# Altium PCB ControlBoard_v3.PcbDoc (part 2 of 3)
Units mm, origin at the board's own origin, x right, y up, seen from the top; angles counter-clockwise.
Board outline 113.28 x 137.67 mm, 2 copper layers (Top Layer, Bottom Layer); 118 components, 107 nets, 631 pads, 214 vias.
Unrouted connection lines stored in the file: 3.
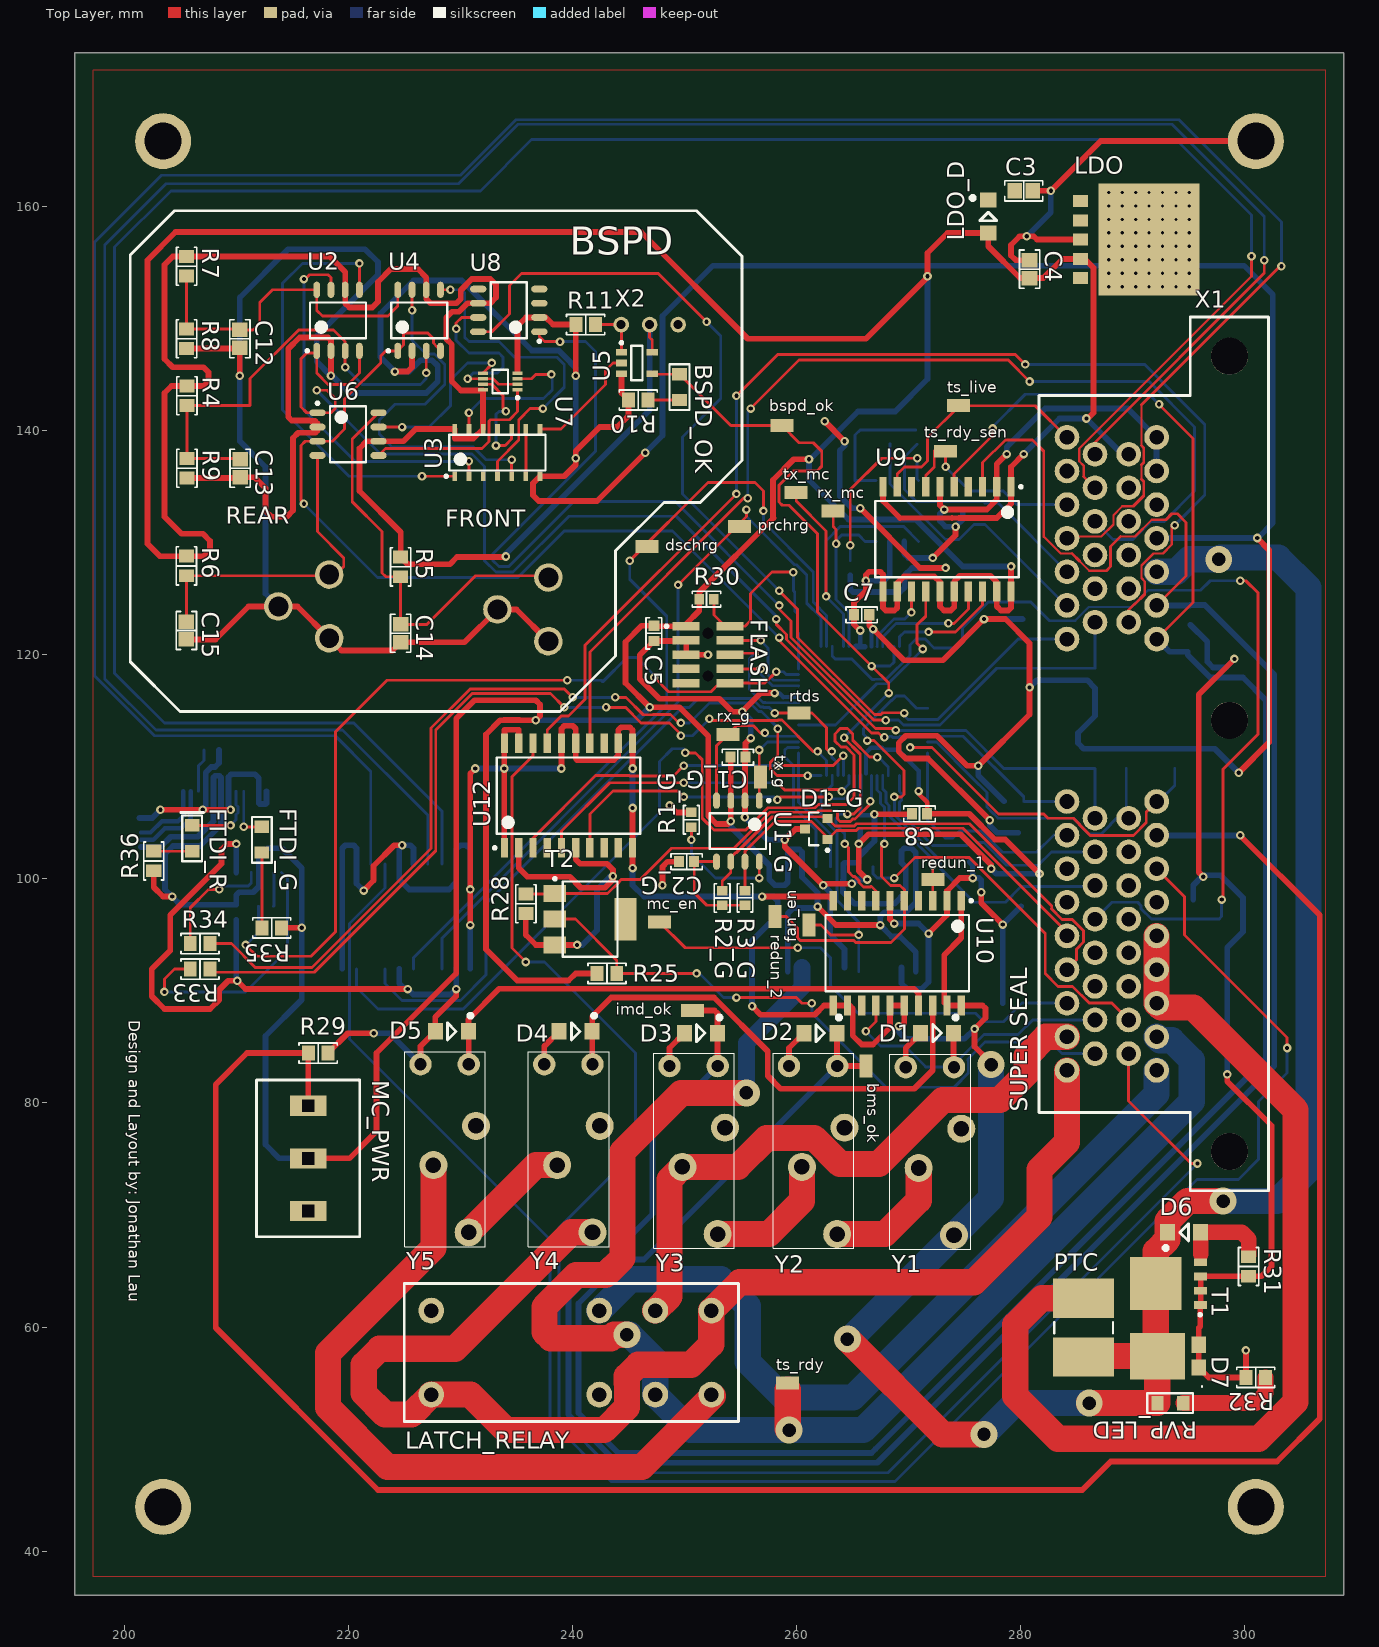
[diagram p0: Top Layer view]

## Via types
v1: diameter 0.762, hole 0.381, Top Layer to Bottom Layer, 205 vias
v2: diameter 2.4, hole 1.2, Top Layer to Bottom Layer, 9 vias

## Nets (pads, with @x,y where several pads share a name; then routed paths per layer and width w, separated by ;. In a path a pad name is that pad's centre, name@x,y a point inside that pad or via, vN(x,y) a via of type N, cw(c..) or ccw(c..) an arc to the next point about the centre after c; other vN are vias at no path point) (continued)
9: (continued)
  Bottom Layer w0.254: v1(266.319,112.353) 266.527,112.353 265.964,112.916 265.964,113.434 268.455,115.926 268.498,115.926 268.904,116.332 269.621,116.332 270.719,115.234 MCU.24@271.688,115.234 ; v1(268.732,107.315) 268.732,105.731 272.821,101.641 272.821,100.95 275.854,97.917 278.638,97.917 R21.1@280.035,99.314 286.543,99.314 X1.A15@286.639,99.41
10: MCU.3 R24.1 X1.A14 | length 90.2
  Top Layer w0.254: v1(297.942,98.157) 298.069,98.284 298.069,109.785 301.204,112.92 301.204,125.516 300.101,126.619 v1(299.593,126.619)
  Bottom Layer w0.203: 282.56,123.056 284.87,123.056 286.078,124.264 289.908,124.264 290.993,125.349 290.993,125.385 291.372,125.764 296.071,125.764
  Bottom Layer w0.254: MCU.3@263.188,120.734 263.188,119.895 263.449,119.634 264.922,119.634 266.758,117.798 266.969,117.798 266.994,117.823 267.997,117.823 270.129,119.955 270.129,120.89 270.649,121.41 271.483,121.41 272.271,120.622 274.306,120.622 274.828,121.144 274.828,122.428 277.114,124.714 280.902,124.714 282.56,123.056 ; X1.A14@286.639,96.41 288.146,97.917 290.449,97.917 290.76,97.606 290.76,97.339 291.688,96.41 295.399,96.41 R24.1@295.402,96.407 297.702,96.407 297.942,96.647 v1(297.942,98.157) ; 296.071,125.764 296.926,126.619 v1(299.593,126.619)
12V_PWR: PTC.1 X1.A28 X1.A29 X1.A30 | length 89.8
  Top Layer w2.34: PTC.1@285.623,62.569 281.898,62.569 279.527,60.198 279.527,53.848 283.337,50.038 301.244,50.038 304.546,53.34 304.546,79.375 295.402,88.519 292.53,88.519 X1.A28@292.139,88.91 X1.A29@292.139,91.91 X1.A30@292.139,94.91